# EAGLE board x50_brakelight (EAGLE 9.2.2)
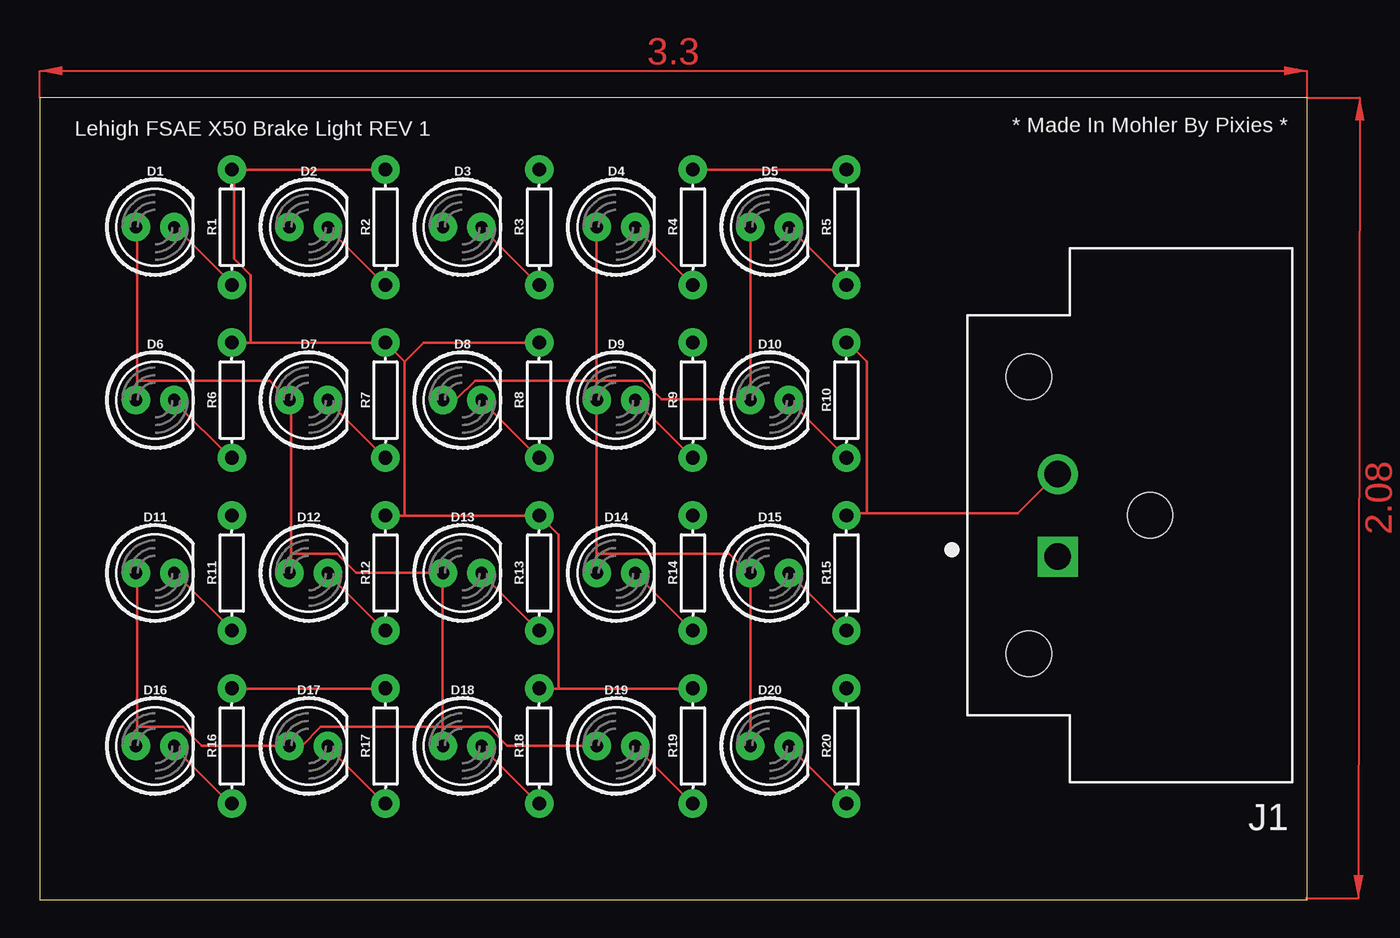
[diagram p0: board, top side]
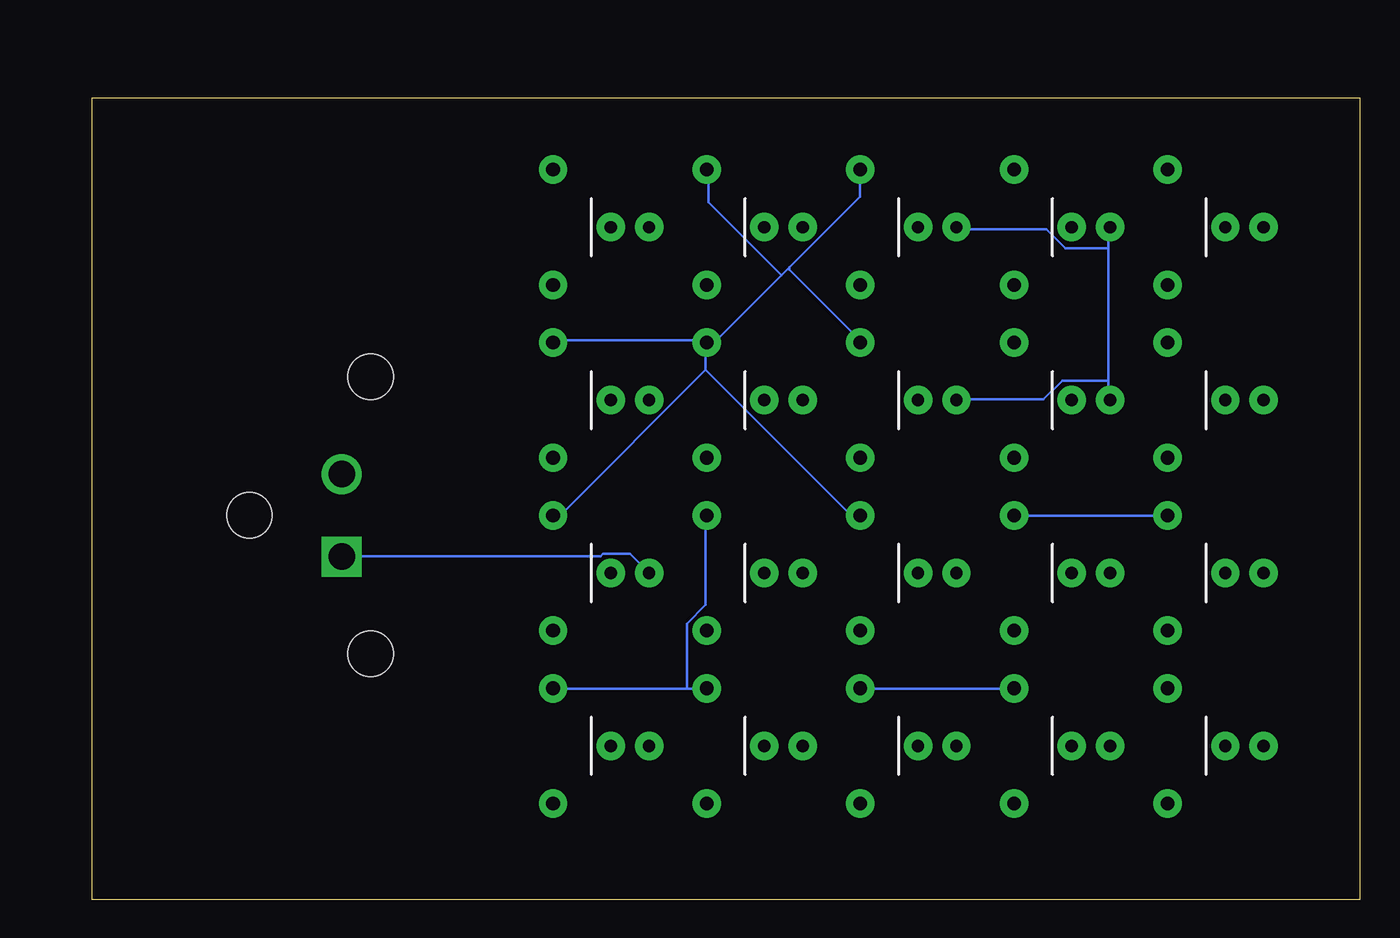
[diagram p1: board, bottom side, seen from below]

Size 83.8 x 53.01 mm. Coordinates in mm from the lower left corner, seen from the top.
Outline: 0,0 83.8,0 83.8,53.01 0,53.01 0,0
Copper layers (1*16): Top 0.035mm / dielectric 1.5mm / Bottom 0.035mm
Design rules "default": minimum track width 6mil, minimum drill 0.35mm, track to track 6mil, track to pad 6mil, pad to pad 6mil, via to via 6mil, smd to smd 6mil, copper to edge 40mil, drill to drill 6mil, minimum pad ring 10mil, minimum via ring 8mil, stop-mask expansion 4mil, vias tented up to drill 0mil, thermal gap 10mil
Net classes: 0 default: clearance 0.205 mm; 1 PWR: width 0.508 mm, drill 0.55 mm, clearance 0.205 mm to class 0, clearance 0.205 mm

## Footprints (pad centres in the part's own frame; a part is rotated, then mirrored left to right if it is on the bottom)
LED_5MM = drill 0.813 pad 1.88: A -1.27,0; K 1.27,0
TE_DT13-2P = drill 1.76 square: 1 0,2.73 | drill 1.76: 2 0,-2.73 | hole 2.99: -6.1,0; 1.9,9.155; 1.9,-9.155
AXIAL-0.3 = drill 0.9 pad 1.88: P$1 -3.81,0; P$2 3.81,0

## Placement (x,y rotation side)
D1  560  [LED_5MM]  7.62,44.45 0 top
D2  560  [LED_5MM]  17.78,44.45 0 top
D3  560  [LED_5MM]  27.94,44.45 0 top
D4  560  [LED_5MM]  38.1,44.45 0 top
D5  560  [LED_5MM]  48.26,44.45 0 top
D6  560  [LED_5MM]  7.62,33.02 0 top
D7  560  [LED_5MM]  17.78,33.02 0 top
D8  560  [LED_5MM]  27.94,33.02 0 top
D9  560  [LED_5MM]  38.1,33.02 0 top
D10  560  [LED_5MM]  48.26,33.02 0 top
D11  560  [LED_5MM]  7.62,21.59 0 top
D12  560  [LED_5MM]  17.78,21.59 0 top
D13  560  [LED_5MM]  27.94,21.59 0 top
D14  560  [LED_5MM]  38.1,21.59 0 top
D15  560  [LED_5MM]  48.26,21.59 0 top
D16  560  [LED_5MM]  7.62,10.16 0 top
D17  560  [LED_5MM]  17.78,10.16 0 top
D18  560  [LED_5MM]  27.94,10.16 0 top
D19  560  [LED_5MM]  38.1,10.16 0 top
D20  560  [LED_5MM]  48.26,10.16 0 top
J1  DT13-2P  [TE_DT13-2P]  67.31,25.4 180 top
R1  [AXIAL-0.3]  12.7,44.45 90 top
R2  [AXIAL-0.3]  22.86,44.45 90 top
R3  [AXIAL-0.3]  33.02,44.45 90 top
R4  [AXIAL-0.3]  43.18,44.45 90 top
R5  [AXIAL-0.3]  53.34,44.45 90 top
R6  [AXIAL-0.3]  12.7,33.02 90 top
R7  [AXIAL-0.3]  22.86,33.02 90 top
R8  [AXIAL-0.3]  33.02,33.02 90 top
R9  [AXIAL-0.3]  43.18,33.02 90 top
R10  [AXIAL-0.3]  53.34,33.02 90 top
R11  [AXIAL-0.3]  12.7,21.59 90 top
R12  [AXIAL-0.3]  22.86,21.59 90 top
R13  [AXIAL-0.3]  33.02,21.59 90 top
R14  [AXIAL-0.3]  43.18,21.59 90 top
R15  [AXIAL-0.3]  53.34,21.59 90 top
R16  [AXIAL-0.3]  12.7,10.16 90 top
R17  [AXIAL-0.3]  22.86,10.16 90 top
R18  [AXIAL-0.3]  33.02,10.16 90 top
R19  [AXIAL-0.3]  43.18,10.16 90 top
R20  [AXIAL-0.3]  53.34,10.16 90 top

## Library data of the parts
D1-D20 = SparkFun-LED
J1 = DT13-2P; AVAILABILITY: In stock; DESCRIPTION: DT13 Series, 5.46mm Pitch 2 Way 1 Row Right Angle PCB Header, Solder Termination; MF: TE Connectivity; MPN: DT13-2P; PARTREV: B; STANDARD: Manufacturer recommendation
R1-R20 = SparkFun-Resistors

## Nets
GND: J1.2 R1.P$2 R2.P$2 R3.P$2 R4.P$2 R5.P$2 R6.P$2 R7.P$2 R8.P$2 R9.P$2 R10.P$2 R11.P$2 R12.P$2 R13.P$2 R14.P$2 R16.P$2 R17.P$2 R18.P$2 R19.P$2 R20.P$2
N$1: D1.K R1.P$1
N$2: D2.K R2.P$1
N$3: D3.K R3.P$1
N$4: D4.K R4.P$1
N$5: D5.K R5.P$1
N$6: D6.K R6.P$1
N$7: D7.K R7.P$1
N$8: D8.K R8.P$1
N$9: D9.K R9.P$1
N$10: D10.K R10.P$1
N$11: D11.K R11.P$1
N$12: D12.K R12.P$1
N$13: D13.K R13.P$1
N$14: D14.K R14.P$1
N$15: D15.K R15.P$1
N$16: D16.K R16.P$1
N$17: D17.K R17.P$1
N$18: D18.K R18.P$1
N$19: D19.K R19.P$1
N$20: D20.K R20.P$1
N$21: R15.P$2
VDD_TACH: D1.A D2.A D3.A D4.A D5.A D6.A D7.A D8.A D9.A D10.A D11.A D12.A D13.A D14.A D15.A D16.A D17.A D18.A D19.A D20.A J1.1

## Tracks (layer width: path | path; a pad name or v marks a point on that pad's centre or on a via)
GND
  Top 0.152: 54.68,25.55 64.69,25.55 67.19,28.06 J1.2 | 54.68,25.55 53.43,25.55 | 34.31,13.94 43.07,13.94 R19.P$2 | 34.31,13.94 33.06,13.94 R18.P$2 | 24.12,25.38 32.88,25.38 R13.P$2 33.06,25.38 34.31,24.12 34.31,13.94 | 24.12,25.38 22.87,25.38 R12.P$2 | 13.94,36.81 22.7,36.81 R7.P$2 22.87,36.81 24.12,35.56 | 13.94,36.81 12.87,36.81 R6.P$2 | 12.87,48.25 12.87,42.35 13.94,41.28 13.94,36.81 | 24.12,35.56 24.12,25.38 | R5.P$2 53.25,48.25 43.24,48.25 R4.P$2 | 54.68,25.55 54.68,35.56 53.43,36.81 R10.P$2 | 12.87,48.25 22.7,48.25 R2.P$2 | 12.87,48.25 R1.P$2 | R16.P$2 12.87,13.94 22.7,13.94 R17.P$2 | 24.12,35.56 25.38,36.81 32.88,36.81 R8.P$2
  Bottom 0.152: 38.24,41.28 42.53,36.99 42.89,36.99 | 38.24,41.28 37.71,41.82 | 37.71,41.82 33.06,46.46 33.06,48.25 R3.P$2 | 42.89,36.99 43.07,36.99 R9.P$2 42.89,36.99 | 37.71,41.82 37.71,41.64 33.06,36.99 R8.P$2 | 42.89,36.99 43.07,37.17 43.42,37.17 43.6,36.99 53.25,36.99 R10.P$2 | 38.24,41.28 43.07,46.1 43.07,48.25 R4.P$2 | R11.P$2 12.87,25.38 22.7,25.38 R12.P$2 | 44.5,13.94 43.24,13.94 R19.P$2 | 44.5,13.94 53.25,13.94 R20.P$2 | 44.5,13.94 44.5,18.23 43.24,19.48 43.24,25.38 R14.P$2 | R17.P$2 22.87,13.94 32.88,13.94 R18.P$2
N$1
  Top 0.152: R1.P$1 12.69,40.74 8.94,44.5 D1.K
N$2
  Top 0.152: R2.P$1 22.7,40.74 19.12,44.32 D2.K
N$3
  Top 0.152: R3.P$1 32.88,40.74 29.31,44.32 D3.K
N$4
  Top 0.152: R4.P$1 43.07,40.74 39.49,44.32 D4.K
N$5
  Top 0.152: R5.P$1 53.25,40.74 49.68,44.32 D5.K
N$6
  Top 0.152: D6.K 8.94,32.88 12.69,29.13 R6.P$1
N$7
  Top 0.152: D7.K 19.12,32.88 22.7,29.31 R7.P$1
N$8
  Top 0.152: D8.K 29.31,32.88 32.88,29.31 R8.P$1
N$9
  Top 0.152: D9.K 39.49,32.88 43.07,29.31 R9.P$1
N$10
  Top 0.152: D10.K 49.68,32.88 53.25,29.31 R10.P$1
N$11
  Top 0.152: R11.P$1 12.69,17.87 8.94,21.62 D11.K
N$12
  Top 0.152: R12.P$1 22.7,17.87 19.12,21.44 D12.K
N$13
  Top 0.152: R13.P$1 32.88,17.87 29.31,21.44 D13.K
N$14
  Top 0.152: R14.P$1 43.07,17.87 39.49,21.44 D14.K
N$15
  Top 0.152: R15.P$1 53.25,17.87 49.68,21.44 D15.K
N$16
  Top 0.152: D16.K 8.94,10.01 12.69,6.25 R16.P$1
N$17
  Top 0.152: D17.K 19.12,10.01 22.7,6.43 R17.P$1
N$18
  Top 0.152: D18.K 29.31,10.01 32.88,6.43 R18.P$1
N$19
  Top 0.152: D19.K 39.49,10.01 43.07,6.43 R19.P$1
N$20
  Top 0.152: D20.K 49.68,10.01 53.25,6.43 R20.P$1
N$21
  Bottom 0.152: 43.24,35.02 43.24,36.81 | 43.24,35.02 52.72,25.55 53.25,25.55 R15.P$2 | 43.24,35.02 33.77,25.55 33.06,25.55
VDD_TACH
  Top 0.152: 6.43,11.44 6.43,21.44 D11.A | 6.43,11.44 6.43,10.19 D16.A | 6.43,11.44 9.47,11.44 10.72,10.19 16.44,10.19 D17.A 16.62,10.19 17.33,10.19 18.59,11.44 26.63,11.44 | 26.63,11.44 26.63,21.44 D13.A 26.63,21.62 20.91,21.62 19.66,22.87 16.62,22.87 | 26.63,11.44 26.63,10.19 D18.A | 26.63,11.44 29.66,11.44 30.91,10.19 36.81,10.19 D19.A | 6.43,34.31 6.43,44.32 D1.A | 6.43,34.31 6.43,33.06 D6.A | 16.62,22.87 16.62,32.88 D7.A 16.44,33.06 15.19,34.31 6.43,34.31 | 16.62,22.87 16.62,21.62 D12.A | 36.81,22.87 36.81,32.88 D9.A 36.81,33.06 36.81,34.31 | 36.81,22.87 36.81,21.62 D14.A | 36.81,34.31 36.81,44.32 D4.A | 36.81,34.31 39.85,34.31 41.1,33.06 46.82,33.06 D10.A 47,33.06 47,44.32 D5.A | D20.A 47,10.19 47,21.44 D15.A 46.82,21.62 45.57,22.87 36.81,22.87 | 36.81,34.31 28.77,34.31 27.52,33.06 26.8,33.06 D8.A
  Bottom 0.152: 16.62,34.31 16.62,33.06 D7.A | 16.62,34.31 16.62,43.07 | 16.62,43.07 16.62,44.32 D2.A | 16.62,34.31 19.66,34.31 20.91,33.06 26.63,33.06 D8.A | 16.62,43.07 19.48,43.07 20.73,44.32 26.63,44.32 D3.A | J1.1 67.19,22.7 50.22,22.7 50.04,22.87 48.25,22.87 47,21.62 D15.A
(copper drawn outside any net)
  shapes: Top area x2

## Text on the board
tPlace: * Made In Mohler By Pixies * | Lehigh FSAE X50 Brake Light REV 1